# Altium PCB MainPCB.PcbDoc
Units mil, origin at the board's own origin, x right, y up, seen from the top; angles counter-clockwise.
Board outline 6000 x 3625 mil, 2 copper layers (Top Layer, Bottom Layer); 26 components, 86 nets, 161 pads, 8 vias.
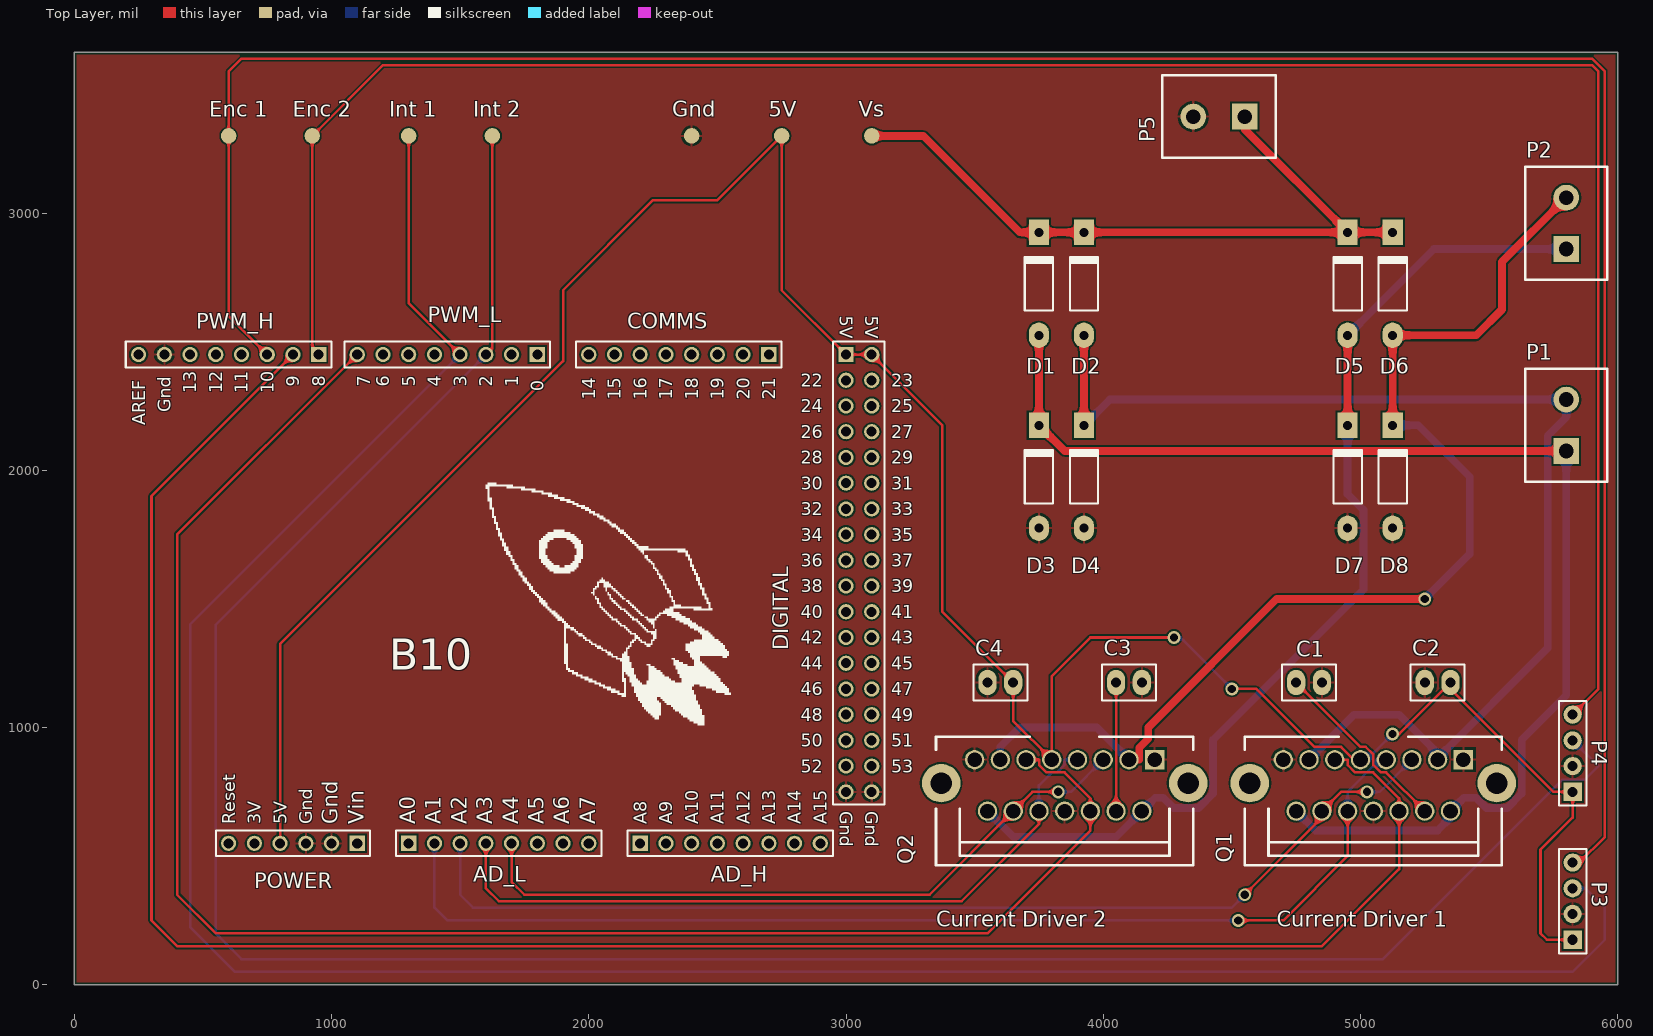
[diagram p0: Top Layer view]
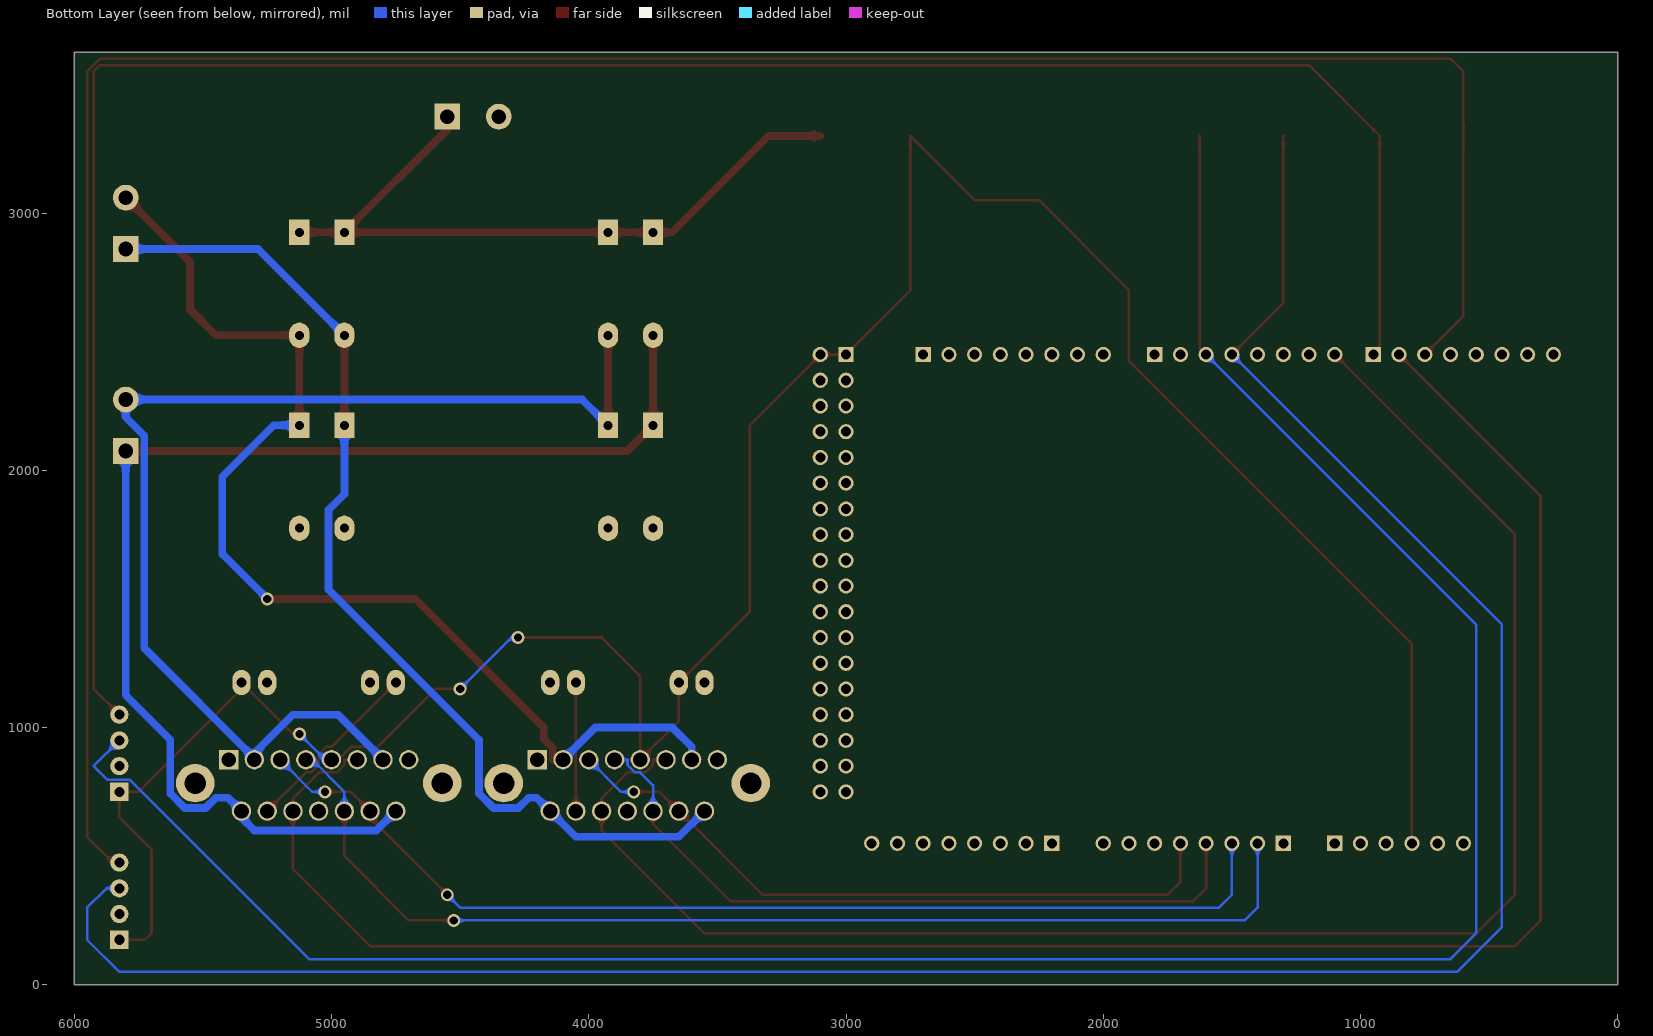
[diagram p1: Bottom Layer view, seen from below]

## Layer stack, top to bottom
Top Solder: solder mask 0.4, Solder Resist, Dk 3.5
Top Layer: signal copper 1.4
Dielectric 1: dielectric 12.6, FR-4, Dk 4.8
Bottom Layer: signal copper 1.4
Bottom Solder: solder mask 0.4, Solder Resist, Dk 3.5

## Board outline
0,3625 0,0 6000,0 6000,3625

## Design rules (kind name [scope] priority, off if disabled: settings)
AssemblyTestPointUsage [All] p1: valid=2
BoardOutlineClearance [All] p1: gap=10
Clearance [All] p1: gap=7
ComponentClearance [All] p1: gap=0 collisioncheckmode=3 verticalgap=0 showdistances=FALSE
FabricationTestPointUsage [All] p1: valid=2 allowmultiple=FALSE
FabricationTestPointUsage TestPointUsage [All] p2: valid=0 allowmultiple=FALSE
FabricationTestpoint Testpoint [All] p2: side=3 testpointundercomponent=TRUE minsize=40 maxsize=100 preferedsize=60 minholesize=0 maxholesize=40 preferedholesize=32 testpointgrid=1 allowsidetop=TRUE allowsidebottom=TRUE usegrid=TRUE gridtolerance=0.01
Height [All] p1: minheight=0 maxheight=2000 prefheight=500
HoleSize NPTH_withPads [(PadIsPlated = 'False') AND ((HoleDiameter < PadXSize_AllLayers ) OR (HoleDiameter < PadYSize_AllLayers))] p1: absolutevalues=TRUE maxlimit=0 minlimit=0 maxpercent=80.000 minpercent=20.000
HoleSize PadlessThruHole [(PadIsPlated = 'True') And ((HoleDiameter >= PadXSize_AllLayers ) OR (HoleDiameter >= PadYSize_AllLayers))] p2: absolutevalues=TRUE maxlimit=0 minlimit=0 maxpercent=80.000 minpercent=20.000
HoleSize HoleSize20 [HoleSize = 20 AND NOT(PadIsPlated)] p3: absolutevalues=TRUE maxlimit=20 minlimit=20 maxpercent=80.000 minpercent=20.000
HoleSize HoleSize20_p [HoleSize = 17 AND PadIsPlated] p4: absolutevalues=TRUE maxlimit=17 minlimit=17 maxpercent=80.000 minpercent=20.000
HoleSize HoleSize28 [HoleSize = 28 AND NOT(PadIsPlated)] p5: absolutevalues=TRUE maxlimit=28 minlimit=28 maxpercent=80.000 minpercent=20.000
HoleSize HoleSize28_p [HoleSize = 25 AND PadIsPlated] p6: absolutevalues=TRUE maxlimit=25 minlimit=25 maxpercent=80.000 minpercent=20.000
HoleSize HoleSize35 [HoleSize = 35 AND NOT(PadIsPlated)] p7: absolutevalues=TRUE maxlimit=35 minlimit=35 maxpercent=80.000 minpercent=20.000
HoleSize HoleSize35_p [HoleSize = 32 AND PadIsPlated] p8: absolutevalues=TRUE maxlimit=32 minlimit=32 maxpercent=80.000 minpercent=20.000
HoleSize HoleSize38 [HoleSize = 38 AND NOT(PadIsPlated)] p9: absolutevalues=TRUE maxlimit=38 minlimit=38 maxpercent=80.000 minpercent=20.000
HoleSize HoleSize38_p [HoleSize = 35 AND PadIsPlated] p10: absolutevalues=TRUE maxlimit=35 minlimit=35 maxpercent=80.000 minpercent=20.000
HoleSize HoleSize42 [HoleSize = 42 AND NOT(PadIsPlated)] p11: absolutevalues=TRUE maxlimit=42 minlimit=42 maxpercent=80.000 minpercent=20.000
HoleSize HoleSize42_p [HoleSize = 39 AND PadIsPlated] p12: absolutevalues=TRUE maxlimit=39 minlimit=39 maxpercent=80.000 minpercent=20.000
HoleSize HoleSize52 [HoleSize = 52 AND NOT(PadIsPlated)] p13: absolutevalues=TRUE maxlimit=52 minlimit=52 maxpercent=80.000 minpercent=20.000
HoleSize HoleSize52_p [HoleSize = 49 AND PadIsPlated] p14: absolutevalues=TRUE maxlimit=49 minlimit=49 maxpercent=80.000 minpercent=20.000
HoleSize HoleSize60 [HoleSize = 60 AND NOT(PadIsPlated)] p15: absolutevalues=TRUE maxlimit=60 minlimit=60 maxpercent=80.000 minpercent=20.000
HoleSize HoleSize60_p [HoleSize = 57 AND PadIsPlated] p16: absolutevalues=TRUE maxlimit=57 minlimit=57 maxpercent=80.000 minpercent=20.000
HoleSize HoleSize86 [HoleSize = 86 AND NOT(PadIsPlated)] p17: absolutevalues=TRUE maxlimit=86 minlimit=86 maxpercent=80.000 minpercent=20.000
HoleSize HoleSize86_p [HoleSize = 83 AND PadIsPlated] p18: absolutevalues=TRUE maxlimit=83 minlimit=83 maxpercent=80.000 minpercent=20.000
HoleSize HoleSize125 [HoleSize = 125 AND NOT(PadIsPlated)] p19: absolutevalues=TRUE maxlimit=125 minlimit=125 maxpercent=80.000 minpercent=20.000
HoleSize HoleSize125_p [HoleSize = 122 AND PadIsPlated] p20: absolutevalues=TRUE maxlimit=122 minlimit=122 maxpercent=80.000 minpercent=20.000
HoleSize HoleSize152 [HoleSize = 152 AND NOT(PadIsPlated)] p21: absolutevalues=TRUE maxlimit=152 minlimit=152 maxpercent=80.000 minpercent=20.000
HoleSize HoleSize152_p [HoleSize = 149 AND PadIsPlated] p22: absolutevalues=TRUE maxlimit=149 minlimit=149 maxpercent=80.000 minpercent=20.000
HoleSize HoleSizeNULL [HoleSize <> ((20 OR 28 OR 35 OR 38 OR 42 OR 52 OR 60 OR 86 OR 125 OR 152) AND NOT(PadIsPlated))] p23: absolutevalues=TRUE maxlimit=0 minlimit=0 maxpercent=80.000 minpercent=20.000
HoleSize HoleSizeNULL_p [HoleSize <> ((17 OR 25 OR 32 OR 35 OR 39 OR 49 OR 57 OR 83 OR 122 OR 149) AND PadIsPlated)] p24: absolutevalues=TRUE maxlimit=0 minlimit=0 maxpercent=80.000 minpercent=20.000
HoleSize [All] p25: absolutevalues=TRUE maxlimit=152 minlimit=1 maxpercent=80.000 minpercent=20.000
MinimumAnnularRing MinimumAnnularRing_Vias [IsVia] p1: minimumring=5
MinimumAnnularRing [All] p2: minimumring=7
MinimumSolderMaskSliver [All] p1: minsoldermaskwidth=5
PolygonConnect [All] p1: connectstyle=Relief reliefconductorwidth=10 reliefentries=4 polygonreliefangle="90 Angle" airgapwidth=10
RoutingVias RoutingViasSize_17 [HoleSize <= 17] p1: holewidth=17 width=50 viastyle="Through Hole" minholewidth=17 minwidth=27 maxholewidth=17 maxwidth=100
RoutingVias RoutingViasSize_25 [HoleSize <= 25] p2: holewidth=25 width=50 viastyle="Through Hole" minholewidth=25 minwidth=35 maxholewidth=25 maxwidth=100
RoutingVias RoutingViasSize_32 [HoleSize <= 32] p3: holewidth=32 width=50 viastyle="Through Hole" minholewidth=32 minwidth=42 maxholewidth=32 maxwidth=100
RoutingVias [All] p4: holewidth=25 width=50 viastyle="Through Hole" minholewidth=25 minwidth=50 maxholewidth=25 maxwidth=50
SilkToSilkClearance [All] p1: silktosilkclearance=0
SilkToSolderMaskClearance [All] p1: minsilkscreentomaskgap=5 clearancetoexposedcopper=FALSE
SilkToSolderMaskClearance SilkToCopperClearance [All] p2: minsilkscreentomaskgap=10 clearancetoexposedcopper=TRUE
SilkToSolderMaskClearance SilkscreenOverComponentPads [IsPad] p3: minsilkscreentomaskgap=10 clearancetoexposedcopper=TRUE
SolderMaskExpansion [All] p1: expansion=4
Width [All] p1: maxlimit=500 minlimit=7 preferedwidth=10
22 further rules are at their usual default settings.

## Classes and differential pairs
component class "Power Supply": P5
component class "Arduino Mega": AD_H AD_L COMMS DIGITAL POWER PWM_H PWM_L
component class "Current Driver 1": C1 C2 D1 D2 D3 D4 P1 Q1
component class "Current Driver 2": C3 C4 D5 D6 D7 D8 P2 Q2
component class "Slot Detectors": P3 P4

## Components (designator, comment, footprint, x,y, rotation, side; value= is the part's Value field where it differs from the comment)
AD_H "AD_H" HDR1X8 2200,550 r0 top
AD_L "AD_L" HDR1X8 1300,550 r0 top
C1 "G-Cap" Cap2.54mm_LGE1.0 4800,1175 r0 top
C2 "G-Cap" Cap2.54mm_LGE1.0 5300,1175 r0 top
C3 "G-Cap" Cap2.54mm_LGE1.0 4100,1175 r0 top
C4 "G-Cap" Cap2.54mm_LGE1.0 3600,1175 r0 top
COMMS "Communication" HDR1X8 2700,2450 r180 top
D1 "1N4148" DO-41_XLGE1.2 3750,2725 r90 top
D2 "1N4148" DO-41_XLGE1.2 3925,2725 r90 top
D3 "1N4148" DO-41_XLGE1.2 3750,1975 r90 top
D4 "1N4148" DO-41_XLGE1.2 3925,1975 r90 top
D5 "1N4148" DO-41_XLGE1.2 4950,2725 r90 top
D6 "1N4148" DO-41_XLGE1.2 5125,2725 r90 top
D7 "1N4148" DO-41_XLGE1.2 4950,1975 r90 top
D8 "1N4148" DO-41_XLGE1.2 5125,1975 r90 top
DIGITAL "IO_36" HDR2X18 3000,2450 r270 top
P1 "Term-Block 2" TERM-BLOCK-5.08MM-2POS 5800,2275 r90 top
P2 "Term-Block 2" TERM-BLOCK-5.08MM-2POS 5800,3060 r90 top
P3 "C-Hdr1x4" HDR1X4_LGE1.0 5825,325 r90 top
P4 "C-Hdr1x4" HDR1X4_LGE1.0 5825,900 r90 top
P5 "Term-Block 2" TERM-BLOCK-5.08MM-2POS 4350,3375 r180 top
POWER "POWER" HDR1X6 1100,550 r180 top
PWM_H "PWM_H" HDR1X8 950,2450 r180 top
PWM_L "PWM_L" HDR1X8 1800,2450 r180 top
Q1 "Q-LN298HS" Multiwatt15_V_ELEC391HS 5050,675 r180 top
Q2 "Q-LN298HS" Multiwatt15_V_ELEC391HS 3850,675 r180 top

## Footprints (in the part's own frame and the unit in brackets; to place one, negate y for a bottom-side part, rotate by r counter-clockwise, add the part's x,y. Pads: shape width x height; smd on the part's side, far side on the other; paste and mask are expansions set on the pad)
Cap2.54mm_LGE1.0 [mm] "Capacitor, Ceramic, Thru-Hole, Dipped Radial; Body 5.1 x 3.2 mm (WxT) Pin Spacing 2.54 mm (typ)"
  oval 1.8x2.5 hole 0.991: 1(-1.27,0) 2(1.27,0)
  silkscreen extent -2.67,-1.78 2.67,1.78
DO-41_XLGE1.2 [mm] "Diode, Axial; Body 5.2 x 2.7 mm (LxDia. max), Lead Dia. 0.86 mm (max)"
  oval 2.5x2 hole 0.889: 1(-5.08,0)
  rect 2.5x2 hole 0.889: 2(5.08,0)
  silkscreen extent -2.65,-1.4 2.75,1.4, body extent -5.44,-1.28 5.49,1.28, height 2.76
HDR1X4_LGE1.0 [mm] "Connector; Header; 4 Position"
  rect 1.8x1.8 hole 0.991: 1(-3.81,0)
  round 1.8 hole 0.991: 2(-1.27,0) 3(1.27,0) 4(3.81,0)
  silkscreen extent -5.17,-1.36 5.17,1.36, body extent -4.95,-1.24 5.21,1.25, height 8.54
HDR1X6 [mm] "Connector; Header; 6 Position"
  rect 1.5x1.5 hole 0.991: 1(0,0)
  round 1.5 hole 0.991: 2(2.54,0) 3(5.08,0) 4(7.62,0) 5(10.16,0) 6(12.7,0)
  silkscreen extent -1.27,-1.27 13.97,1.27
HDR1X8 [mm] "Connector; Header; 8 Position"
  rect 1.5x1.5 hole 0.991: 1(0,0)
  round 1.5 hole 0.991: 2(2.54,0) 3(5.08,0) 4(7.62,0) 5(10.16,0) 6(12.7,0) 7(15.24,0) 8(17.78,0)
  silkscreen extent -1.27,-1.27 19.05,1.27
HDR2X18 [mm] "Connector; Header; 18x2 Position"
  rect 1.5x1.5 hole 0.991: 1(0,0)
  round 1.5 hole 0.991: 2(0,2.54) 3(2.54,0) 4(2.54,2.54) 5(5.08,0) 6(5.08,2.54) 7(7.62,0) 8(7.62,2.54) 9(10.16,0) 10(10.16,2.54) 11(12.7,0) 12(12.7,2.54) 13(15.24,0) 14(15.24,2.54) 15(17.78,0) 16(17.78,2.54) 17(20.32,0) 18(20.32,2.54) 19(22.86,0) 20(22.86,2.54) 21(25.4,0) 22(25.4,2.54) 23(27.94,0) 24(27.94,2.54) 25(30.48,0) 26(30.48,2.54) 27(33.02,0) 28(33.02,2.54) 29(35.56,0) 30(35.56,2.54) 31(38.1,0) 32(38.1,2.54) 33(40.64,0) 34(40.64,2.54) 35(43.18,0) 36(43.18,2.54)
  silkscreen extent -1.27,-1.27 44.45,3.81
Multiwatt15_V_ELEC391HS [mil]
  rect 75x75 hole 57: 1(-350,-200)
  round 75 hole 57: 2(-300,0) 3(-250,-200) 4(-200,0) 5(-150,-200) 6(-100,0) 7(-50,-200) 8(0,0) 9(50,-200) 10(100,0) 11(150,-200) 12(200,0) 13(250,-200) 14(300,0) 15(350,-200)
  round 150 hole 83: 16(480,-109) 17(-480,-109)
  silkscreen extent -500,-289 500,211, body extent -385,-200 387,157, height 826
TERM-BLOCK-5.08MM-2POS [mil] "TERM BLOCK 5.08MM VERT 2POS PCB"
  rect 100x100 hole 57: 1(-200,0)
  round 100 hole 57: 2(0,0)
  silkscreen extent -320,-160 120,160

## Part data
C1 C2 C3 C4: "Capacitor (specify value)"
D1 D2 D3 D4 D5 D6 D7 D8: library part T-DiodeRect, "High-speed Diode"
P1 P2 P5: library part C-Block2, "Terminal-Block 1x2"
P3 P4: "Header, 4-Pin"
Q1 Q2: "LN298 - IC Bridge Driver Par 15Multiwatt"

## Free pads (board coordinates)
  round 60 smd: 21(600,3300) 22(925,3300) 23(1300,3300) 24(1625,3300) 25(3100,3300) 26(2750,3300) 27(2400,3300)

## Via types
v1: diameter 50, hole 32, Top Layer to Bottom Layer, 8 vias

## Nets (pads, with @x,y where several pads share a name; then routed paths per layer and width w, separated by ;. In a path a pad name is that pad's centre, name@x,y a point inside that pad or via, vN(x,y) a via of type N, cw(c..) or ccw(c..) an arc to the next point about the centre after c; other vN are vias at no path point)
3V3: POWER.5
5V: C2.2 C4.2 DIGITAL.1 DIGITAL.2 P3.1 P4.1 pad.26 POWER.4 Q1.9 Q2.9 | length 10287.5
  Top Layer w10: POWER.4 800,1325 1900,2425 1900,2700 2250,3050 2500,3050 pad.26 2750,2700 DIGITAL.1 DIGITAL.2 3375,2175 3375,1450 C4.2 3650,1025 Q2.9 3800,1200 3950,1350 v1(4275,1350) ; v1(4500,1150) 4595,1150 4820.5,924.5 4924.54,924.5 4967.5,881.54 4967.5,875 Q1.9 ; v1(5125,975) 5150,975 C2.2 5350,1150 5750,750 P4.1 5825,650 5700,525 5700,200 5725,175 P3.1
  Bottom Layer w10: v1(4275,1350) 4300,1350 v1(4500,1150) ; Q1.9 5025,875 v1(5125,975)
AD0: AD_L.1
AD1: AD_L.2 Q1.7 Q1.10 | length 4376
  Top Layer w10: v1(4525,250) 4700,250 4950,500 Q1.10
  Bottom Layer w10: AD_L.2 1400,300 1450,250 v1(4525,250) ; Q1.10 4950,750 5075,875 Q1.7
AD2: AD_L.3 Q1.5 Q1.12 | length 4173.5
  Top Layer w10: v1(4550,350) 4850,650 Q1.12 4925,750 v1(5025,750)
  Bottom Layer w10: AD_L.3 1500,350 1550,300 4500,300 v1(4550,350) ; v1(5025,750) 5075,750 Q1.5
AD3: AD_L.4 Q2.7 Q2.10 | length 2823.1
  Top Layer w10: AD_L.4 1600,375 1650,325 3450,325 3750,625 Q2.10
  Bottom Layer w10: Q2.10 3750,775 3800.5,825.5 3820.5,825.5 3849.5,854.5 3849.5,874.5 3850,875 Q2.7
AD4: AD_L.5 Q2.5 Q2.12 | length 2688.2
  Top Layer w10: AD_L.5 1700,400 1750,350 3325,350 Q2.12 3725,750 v1(3825,750)
  Bottom Layer w10: v1(3825,750) 3875,750 Q2.5
AD5: AD_L.6
AD6: AD_L.7
AD7: AD_L.8
AD8: AD_H.1
AD9: AD_H.2
AD10: AD_H.3
AD11: AD_H.4
AD12: AD_H.5
AD13: AD_H.6
AD14: AD_H.7
AD15: AD_H.8
AREF: PWM_H.8
GND: C1.2 C2.1 C3.2 C4.1 D3.1 D4.1 D7.1 D8.1 DIGITAL.35 DIGITAL.36 P3.2 P4.2 P5.2 pad.27 POWER.2 POWER.3 PWM_H.7 Q1.1 Q1.8 Q1.15 Q2.1 Q2.8 Q2.15
IO22: DIGITAL.3
IO23: DIGITAL.4
IO24: DIGITAL.5
IO25: DIGITAL.6
IO26: DIGITAL.7
IO27: DIGITAL.8
IO28: DIGITAL.9
IO29: DIGITAL.10
IO30: DIGITAL.11
IO31: DIGITAL.12
IO32: DIGITAL.13
IO33: DIGITAL.14
IO34: DIGITAL.15
IO35: DIGITAL.16
IO36: DIGITAL.17
IO37: DIGITAL.18
IO38: DIGITAL.19
IO39: DIGITAL.20
IO40: DIGITAL.21
IO41: DIGITAL.22
IO42: DIGITAL.23
IO43: DIGITAL.24
IO44: DIGITAL.25
IO45: DIGITAL.26
IO46: DIGITAL.27
IO47: DIGITAL.28
IO48: DIGITAL.29
IO49: DIGITAL.30
IO50: DIGITAL.31
IO51: DIGITAL.32
IO52: DIGITAL.33
IO53: DIGITAL.34
NetC1_1: C1.1 Q1.4 | length 730.5
  Top Layer w10: C1.1 5000.5,924.5 5020.5,924.5 5050.5,894.5 5050.5,854.5 5079.5,825.5 5099.5,825.5 Q1.4
NetC3_1: C3.1 Q2.4 | length 500
  Top Layer w10: Q2.4 C3.1
NetICSP_1: 
NetICSP_3: 
NetICSP_4: 
PWM2: P4.3 pad.24 PWM_L.3 | length 9413.8
  Top Layer w10: PWM_L.3 1625,2475 pad.24
  Bottom Layer w10: PWM_L.3 550,1400 550,200 650,100 5087.16,100 5784.6,797.43 5872.43,797.43 5925,850 P4.3
PWM3: P3.3 pad.23 PWM_L.4 | length 9498.1
  Top Layer w10: pad.23 1300,2650 PWM_L.4
  Bottom Layer w10: PWM_L.4 450,1400 450,225 625,50 5825,50 5950,175 5950,300 5875,375 P3.3
PWM4: PWM_L.5
PWM5: PWM_L.6
PWM6: PWM_L.7
PWM7: PWM_L.8 Q2.6 Q2.11 | length 6616.6
  Top Layer w10: PWM_L.8 400,1750 400,350 550,200 3550,200 3950,600 Q2.6 3950,725 3849.5,825.5 3779.5,825.5 3750.5,854.5 3750.5,874.5 3750,875 Q2.11
PWM8: P4.4 pad.22 PWM_H.1 | length 8526
  Top Layer w10: PWM_H.1 925,2475 pad.22 1200,3575 5900,3575 5925,3550 5925,1150 P4.4
PWM9: PWM_H.2 Q1.6 Q1.11 | length 8042.4
  Top Layer w10: PWM_H.2 300,1900 300,250 400,150 4850,150 5150,450 Q1.6 5150,725 5049.5,825.5 4979.5,825.5 4950.5,854.5 4950.5,874.5 4950,875 Q1.11
PWM10: P3.4 pad.21 PWM_H.3 | length 9695
  Top Layer w10: PWM_H.3 600,2600 pad.21 600,3550 650,3600 5900,3600 5950,3550 5950,575 5850,475 P3.4
PWM11: PWM_H.4
PWM12: PWM_H.5
PWM13: PWM_H.6
RESET: POWER.6
RX0: PWM_L.1
RX1: COMMS.3
RX2: COMMS.5
RX3: COMMS.7
SCL: COMMS.1
SDA: COMMS.2
TX0: PWM_L.2
TX1: COMMS.4
TX2: COMMS.6
TX3: COMMS.8
V+1: D2.1 D4.2 P1.2 Q1.3 Q1.13 | length 4527
  Top Layer w30: D4.2 D2.1
  Bottom Layer w30: D4.2 4025,2275 P1.2 5800,2206.11 5728,2134.11 5728,1309.11 Q1.3@5300,881.11 ; Q1.13 4975,1050 5150,1050 5300,900 Q1.3@5300,881.11 ; Q1.3 Q1.3@5300,881.11
V+2: D6.1 D8.2 P2.2 Q2.3 Q2.13 | length 4380
  Top Layer w30: Q2.3 4140.5,875 4140.5,921.61 4175,956.11 4175,1000 4675,1500 v1(5250,1500) ; D8.2 D6.1 5450,2525 5550,2625 5550,2810 P2.2
  Bottom Layer w30: Q2.13 3600,925 3675,1000 3975,1000 Q2.3 ; D8.2 5225,2175 5425,1975 5425,1675 v1(5250,1500)
V-1: D1.1 D3.2 P1.1 Q1.2 Q1.14 | length 4860.1
  Top Layer w30: D1.1 D3.2 3850,2075 P1.1
  Bottom Layer w30: Q1.14 4825,600 5300,600 5350,650 Q1.2 5402.5,727.5 5449.32,727.5 5489.82,687 5570.18,687 5627,743.82 5627,952 5800,1125 P1.1
V-2: D5.1 D7.2 P2.1 Q2.2 Q2.14 | length 4059.3
  Top Layer w30: D7.2 D5.1
  Bottom Layer w30: Q2.14 3650,575 4050,575 Q2.2 4202.5,727.5 4233,727.5 4273.5,687 4370.18,687 4427,743.82 4427,952 5011.37,1536.37 5011.37,1846.21 4950,1907.58 D7.2 ; D5.1 5285,2860 P2.1
VIN: POWER.1
VS: D1.2 D2.2 D5.2 D6.2 P5.1 pad.25 | length 2796
  Top Layer w30: pad.25 3300,3300 3675,2925 D1.2 D2.2 D5.2 ; P5.1 4550,3325 D5.2 ; D6.2 D5.2
pads on no net: Q1.16 Q1.17 Q2.16 Q2.17

## Polygon pours and split planes (outlines as drawn)
GND on Top Layer "GND" (solid, remove dead copper, pour order 2): 0,3625 6000,3625 6000,0 0,0

## Silkscreen, mask and mechanical layers (free items; w line width, h text height)
Top Overlay:
  drawing of 2 lines, arcs and shapes, not listed
  text "Enc 1" at 525,3375 h60
  text "Enc 2" at 850,3375 h60
  text "Int 1" at 1225,3375 h60
  text "Int 2" at 1550,3375 h60
  text "Gnd" at 2325,3375 h60
  text "5V" at 2700,3375 h60
  text "Vs" at 3050,3375 h60
  text "0" at 1825,2350 h50 r90
  text "9" at 875,2325 h50 r90
  text "8" at 975,2325 h50 r90
  text "7" at 1150,2325 h50 r90
  text "6" at 1225,2325 h50 r90
  text "5" at 1325,2325 h50 r90
  text "4" at 1425,2325 h50 r90
  text "3" at 1525,2325 h50 r90
  text "2" at 1625,2325 h50 r90
  text "1" at 1725,2325 h50 r90
  text "22" at 2825,2325 h50
  text "23" at 3175,2325 h50
  text "13" at 475,2300 h50 r90
  text "12" at 575,2300 h50 r90
  text "11" at 675,2300 h50 r90
  text "10" at 775,2300 h50 r90
  text "14" at 2025,2275 h50 r90
  text "15" at 2125,2275 h50 r90
  text "16" at 2225,2275 h50 r90
  text "17" at 2325,2275 h50 r90
  text "18" at 2425,2275 h50 r90
  text "19" at 2525,2275 h50 r90
  text "20" at 2625,2275 h50 r90
  text "21" at 2725,2275 h50 r90
  text "Gnd" at 375,2225 h50 r90
  text "24" at 2825,2225 h50
  text "25" at 3175,2225 h50
  text "AREF" at 275,2175 h50 r90
  text "26" at 2825,2125 h50
  text "27" at 3175,2125 h50
  text "28" at 2825,2025 h50
  text "29" at 3175,2025 h50
  text "30" at 2825,1925 h50
  text "31" at 3175,1925 h50
  text "32" at 2825,1825 h50
  text "33" at 3175,1825 h50
  text "34" at 2825,1725 h50
  text "35" at 3175,1725 h50
  text "36" at 2825,1625 h50
  text "37" at 3175,1625 h50
  text "38" at 2825,1525 h50
  text "39" at 3175,1525 h50
  text "40" at 2825,1425 h50
  text "41" at 3175,1425 h50
  text "42" at 2825,1325 h50
  text "43" at 3175,1325 h50
  text "B10" at 1225,1225 h120
  text "44" at 2825,1225 h50
  text "45" at 3175,1225 h50
  text "46" at 2825,1125 h50
  text "47" at 3175,1125 h50
  text "48" at 2825,1025 h50
  text "49" at 3175,1025 h50
  text "50" at 2825,925 h50
  text "51" at 3175,925 h50
  text "52" at 2825,825 h50
  text "53" at 3175,825 h50
  text "Reset" at 625,625 h50 r90
  text "3V" at 725,625 h50 r90
  text "5V" at 825,625 h50 r90
  text "Gnd" at 925,625 h50 r90
  text "Gnd" at 1025,625 h60 r90
  text "Vin" at 1125,625 h60 r90
  text "A0" at 1325,625 h60 r90
  text "A1" at 1425,625 h60 r90
  text "A2" at 1525,625 h60 r90
  text "A3" at 1625,625 h60 r90
  text "A4" at 1725,625 h60 r90
  text "A5" at 1825,625 h60 r90
  text "A6" at 1925,625 h60 r90
  text "A7" at 2025,625 h60 r90
  text "A8" at 2225,625 h50 r90
  text "A9" at 2325,625 h50 r90
  text "A10" at 2425,625 h50 r90
  text "A11" at 2525,625 h50 r90
  text "A12" at 2625,625 h50 r90
  text "A13" at 2725,625 h50 r90
  text "A14" at 2825,625 h50 r90
  text "A15" at 2925,625 h50 r90
  text "Current Driver 2" at 3350,225 h60
  text "Current Driver 1" at 4675,225 h60

## Text inside footprints (layer, text, board x,y; h text height)
DIGITAL: Top Overlay "5V" at 3075,2600 h50 r270; Top Overlay "5V" at 2975,2600 h50 r270; Top Overlay "Gnd" at 2975,675 h50 r270; Top Overlay "Gnd" at 3075,675 h50 r270